# Altium PCB Moneybox.PcbDoc
Units mm, origin at the board's own origin, x right, y up, seen from the top; angles counter-clockwise.
Board outline 56.28 x 49.45 mm, 2 copper layers (Top Layer, Bottom Side), stack 1.536 mm thick; 40 components, 33 nets, 140 pads, 0 vias.
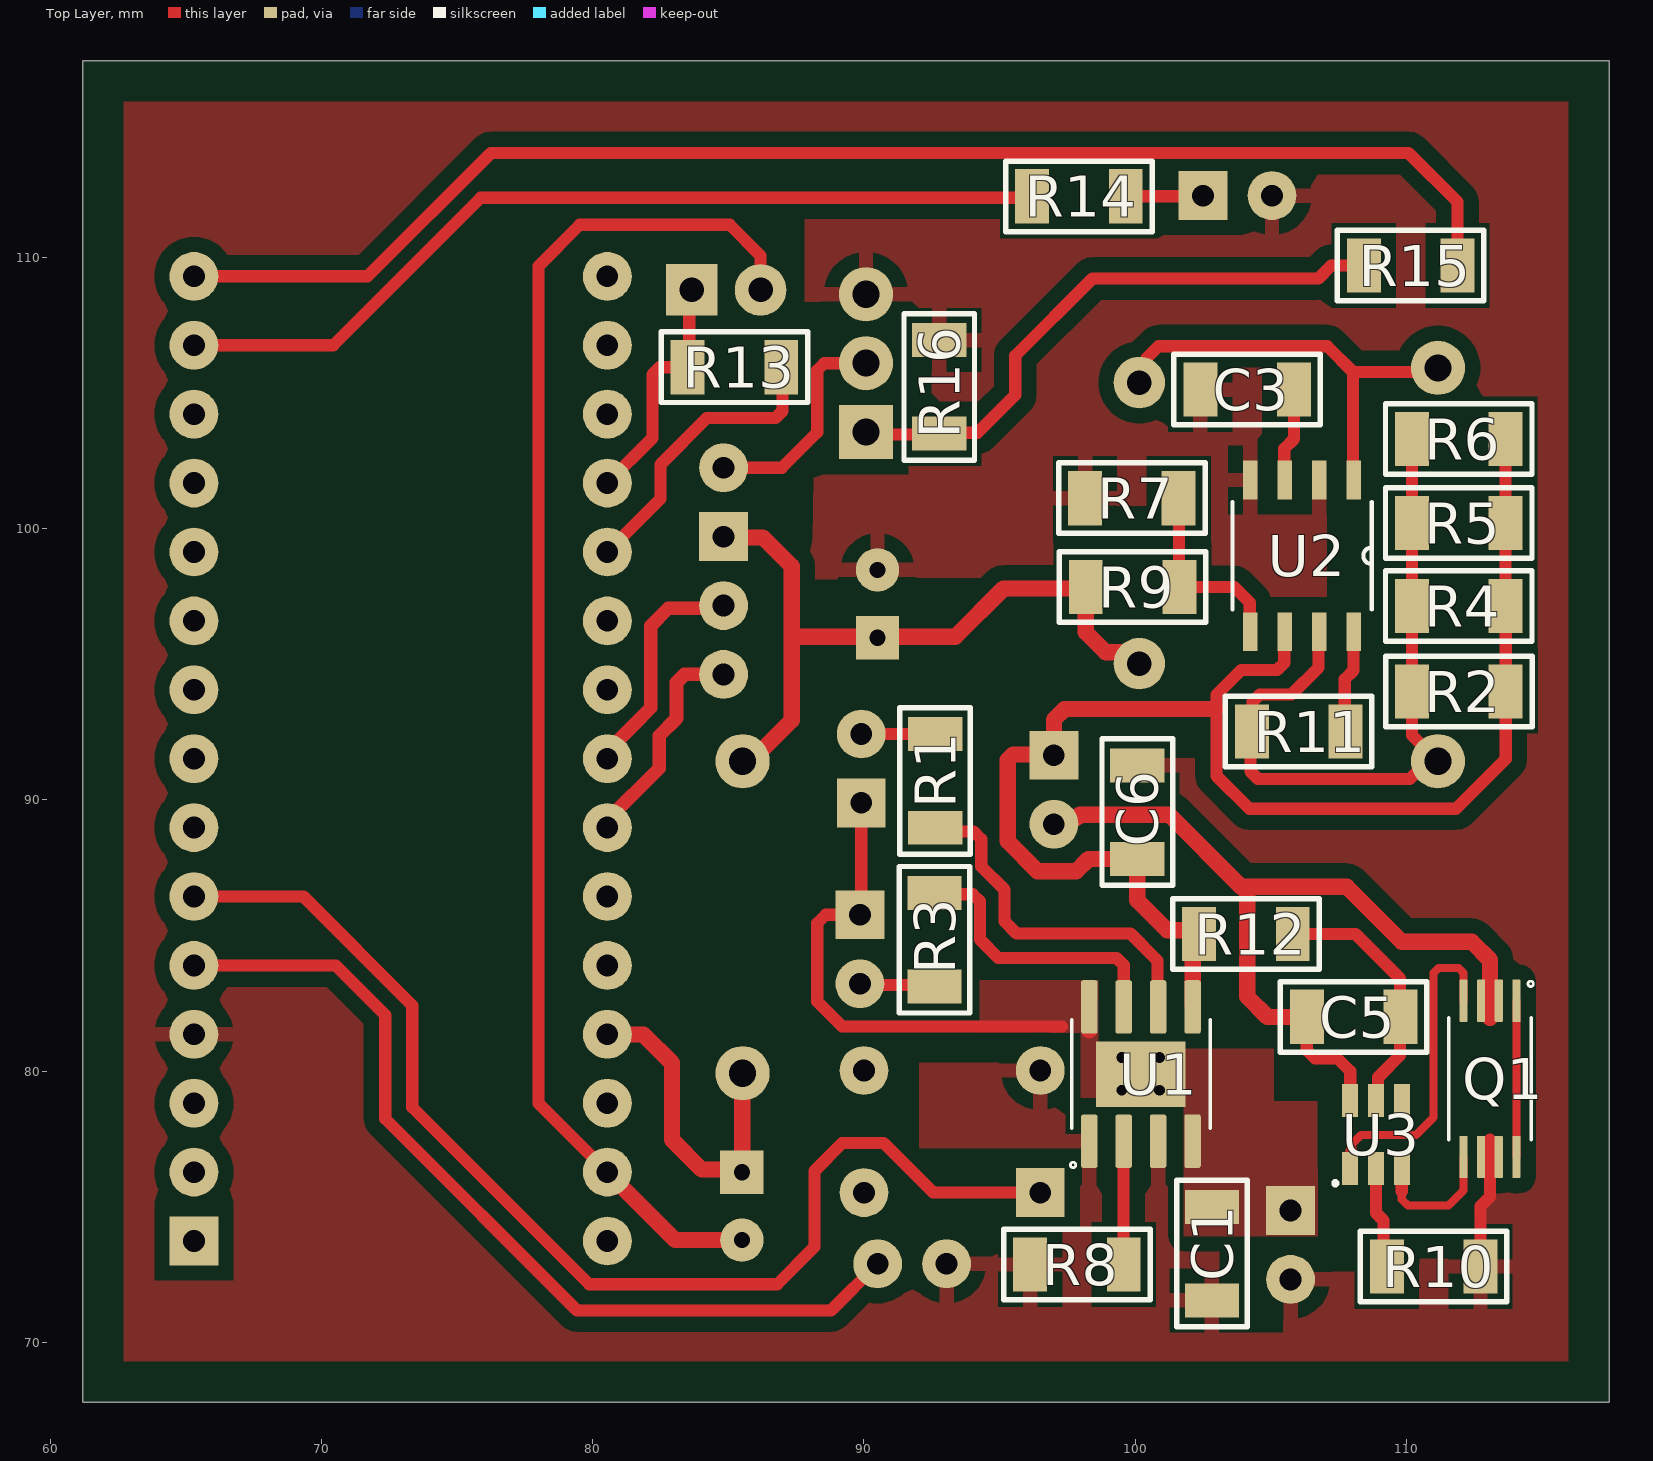
[diagram p0: Top Layer view]
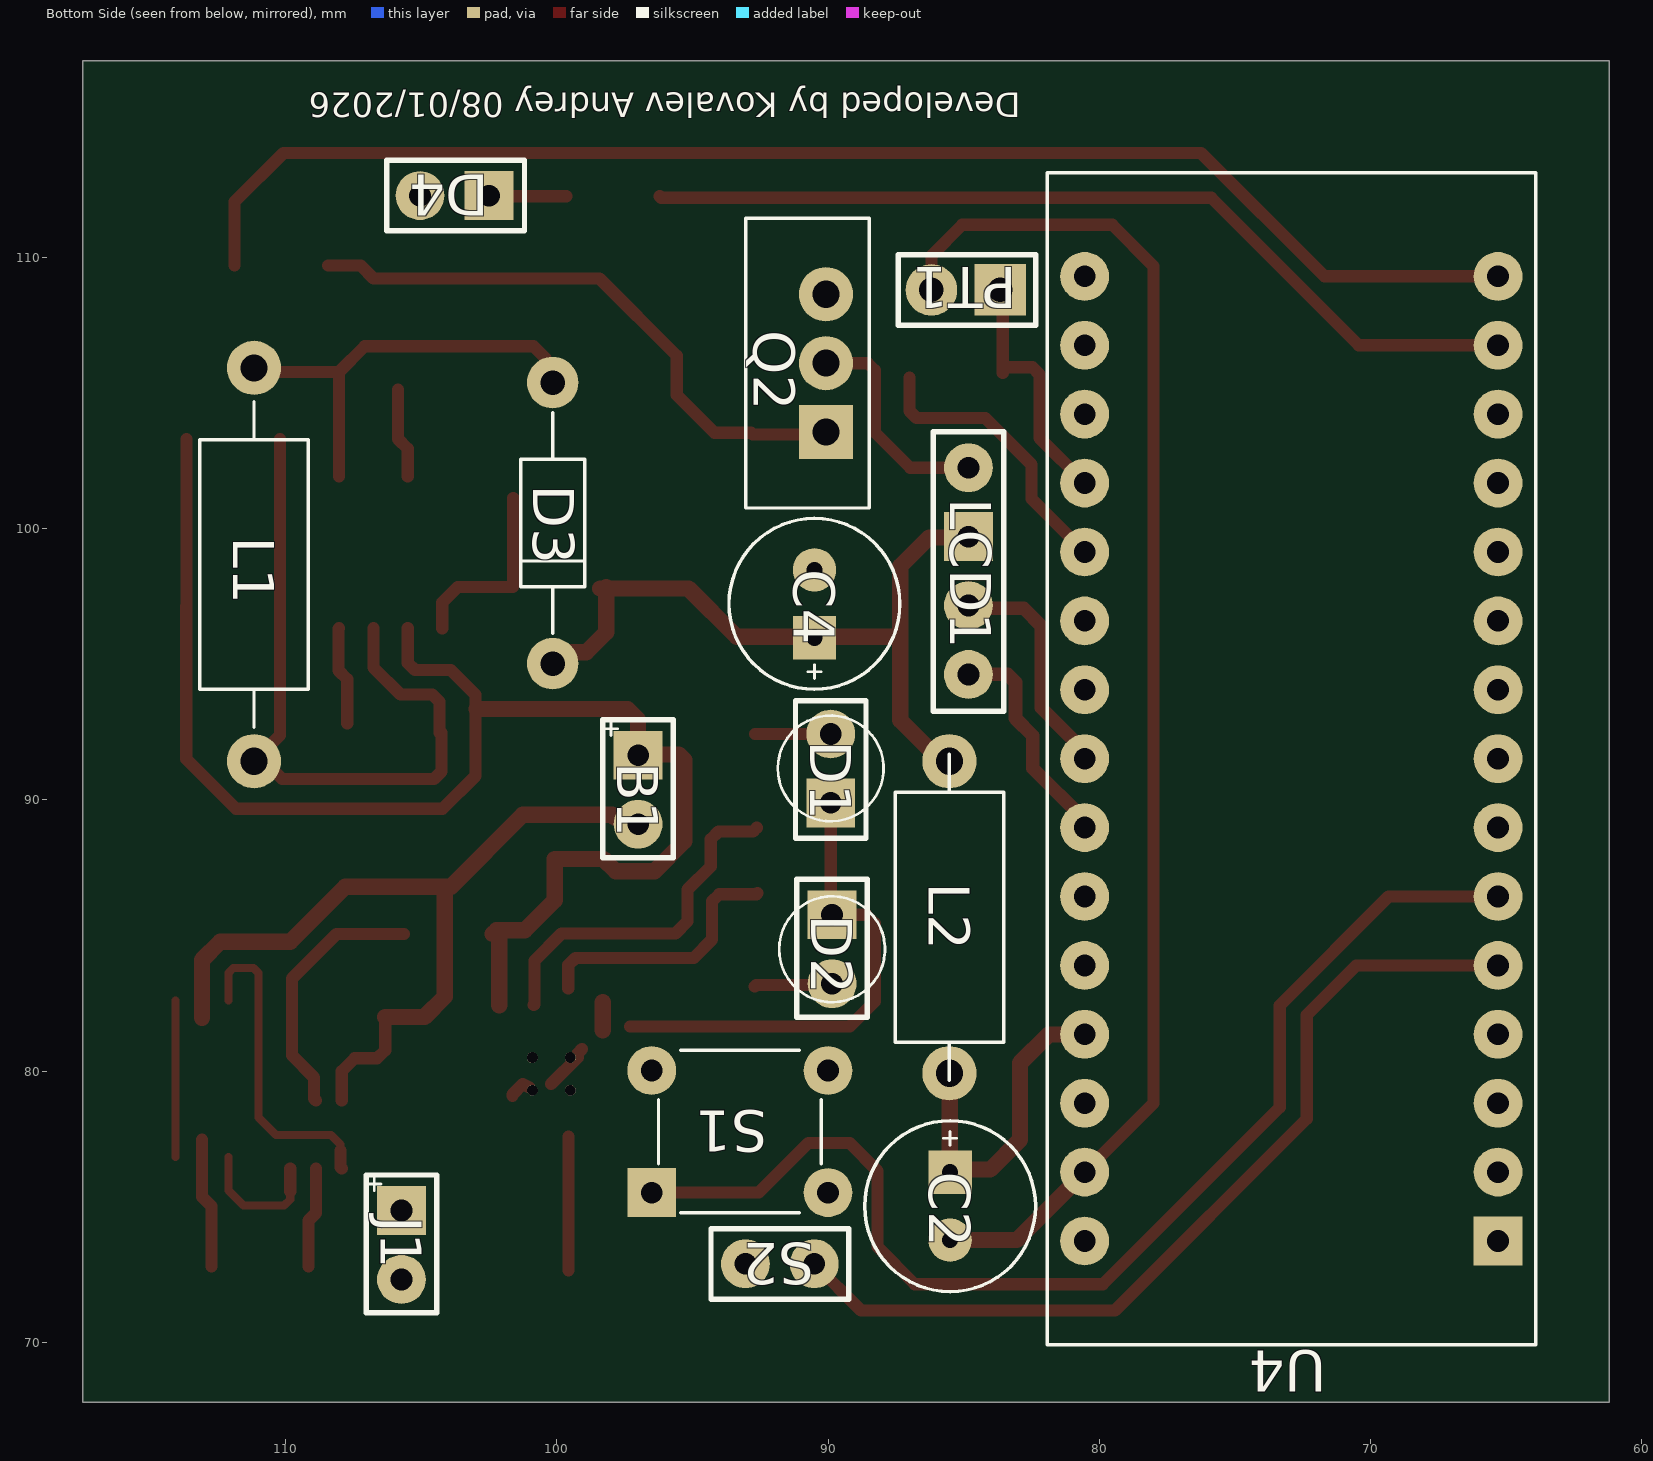
[diagram p1: Bottom Side view, seen from below]
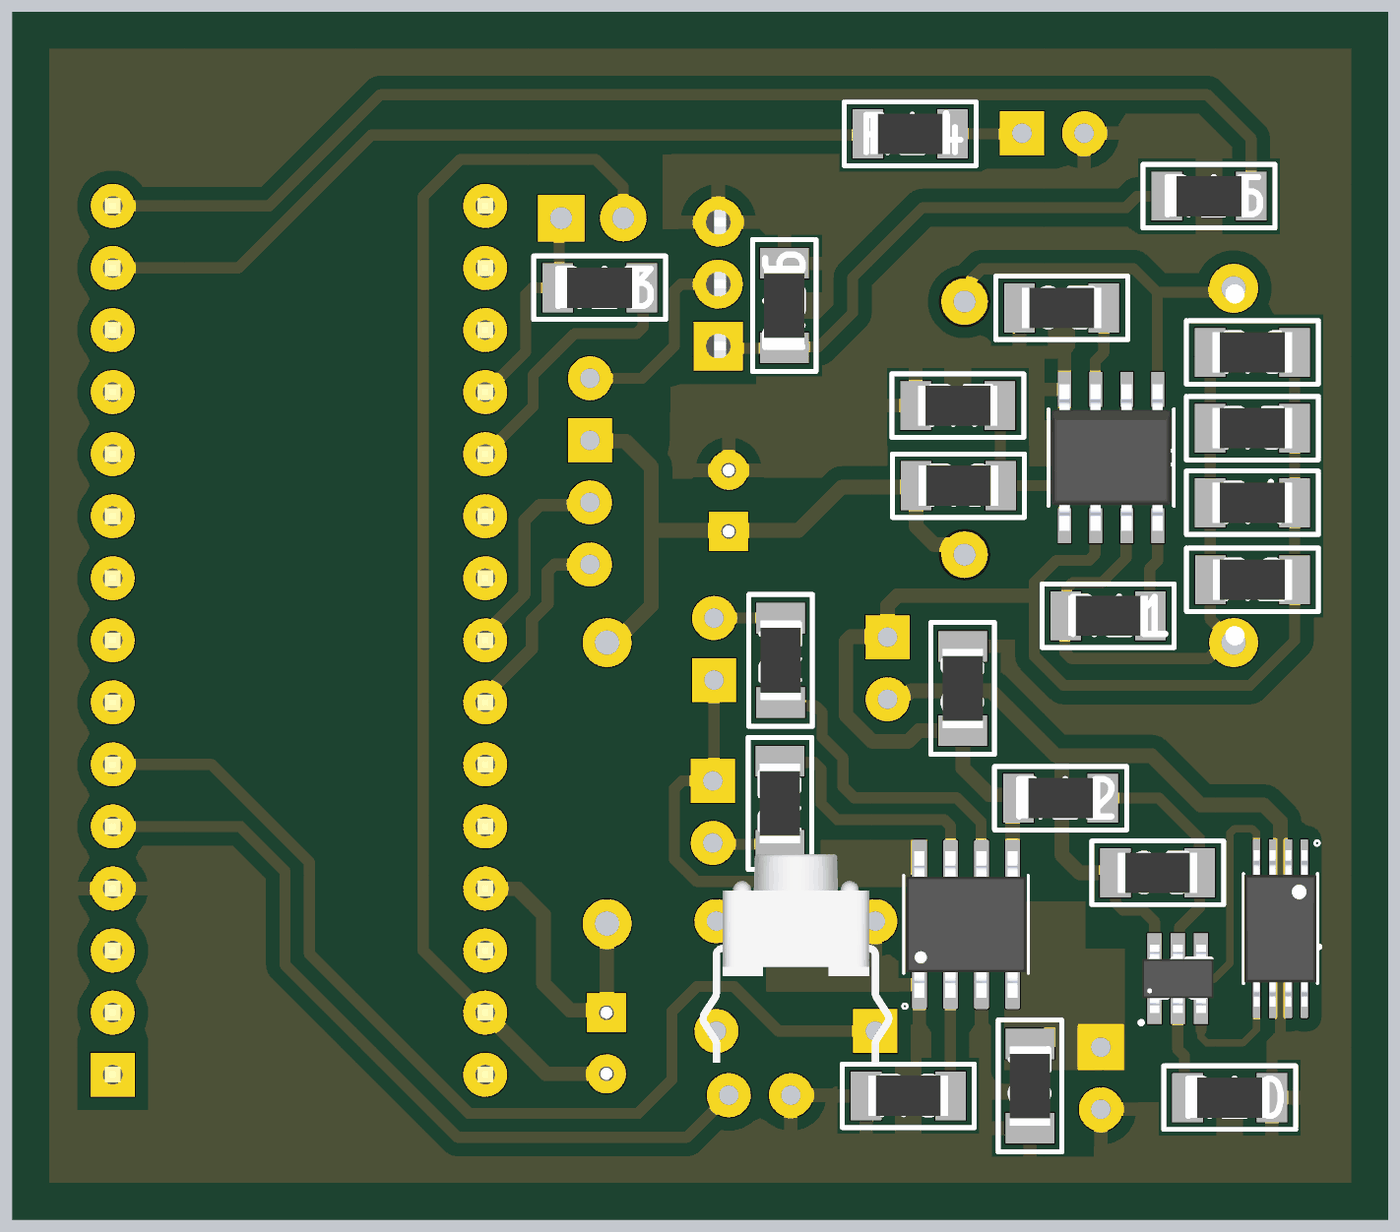
[diagram p2: 3D render of the assembled board from above, using the file's embedded part models]

## Layer stack, top to bottom
Top Solder: solder mask 0.0102, Solder Resist, Dk 3.5
Top Layer: signal copper 0.0356
Dielectric 1: dielectric 1.5, FR-4, Dk 4.8
Bottom Side: signal copper (thickness not stored)

## Board outline
61.2,117.25 117.475,117.25 117.475,67.8 61.2,67.8

## Design rules (kind name [scope] priority, off if disabled: settings)
BoardOutlineClearance [All] p1: gap=1.5 ignorepadtopadclearanceinfootprint=FALSE
Clearance [OnLayer('Top Layer')] p1: gap=0.45 ignorepadtopadclearanceinfootprint=FALSE except(0.2: SMDPad-SMDPad; 0.35: Arc-SMDPad Track-SMDPad; 0.55: Arc-Fill Arc-Poly Arc-Region Track-Fill Track-Poly Track-Region SMDPad-Fill SMDPad-Poly SMDPad-Region THPad-Fill THPad-Poly THPad-Region Via-Fill Via-Poly Via-Region Fill-Fill Fill-Poly Fill-Region Poly-Poly Poly-Region Region-Region)
Clearance Unplated_Pads_Clearance [IsPad and OnLayer ('Multi-layer') and not PadIsPlated] p2: gap=0.3 ignorepadtopadclearanceinfootprint=TRUE
DiffPairsRouting [All] p1: maxlimit=0.254 minlimit=0.254 mostfreqgap=0.254 toplayer_minwidth=0.381 toplayer_maxwidth=0.381 toplayer_prefwidth=0.381 bottomlayer_minwidth=0.381 bottomlayer_maxwidth=0.381 bottomlayer_prefwidth=0.381 substack1={2774025B-2029-49B0-88C8-9F4E20DB7E90} toplayer_{2774025b-2029-49b0-88c8-9f4e20db7e90}_mingap=0.3 toplayer_{2774025b-2029-49b0-88c8-9f4e20db7e90}_maxgap=1 toplayer_{2774025b-2029-49b0-88c8-9f4e20db7e90}_prefgap=0.45 toplayer_{2774025b-2029-49b0-88c8-9f4e20db7e90}_minwidth=0.3 toplayer_{2774025b-2029-49b0-88c8-9f4e20db7e90}_maxwidth=1 toplayer_{2774025b-2029-49b0-88c8-9f4e20db7e90}_prefwidth=0.45 bottomlayer_{2774025b-2029-49b0-88c8-9f4e20db7e90}_mingap=0.3 bottomlayer_{2774025b-2029-49b0-88c8-9f4e20db7e90}_prefgap=0.45 bottomlayer_{2774025b-2029-49b0-88c8-9f4e20db7e90}_minwidth=0.3 bottomlayer_{2774025b-2029-49b0-88c8-9f4e20db7e90}_maxwidth=1 bottomlayer_{2774025b-2029-49b0-88c8-9f4e20db7e90}_prefwidth=0.45 maxuncoupledlength=12.7
HoleToHoleClearance [All] p1: gap=0.2 allowstackedmicrovias=TRUE
MinimumSolderMaskSliver [All] p1: minsoldermaskwidth=0.15
PlaneClearance [All] p1: clearance=0.55
PlaneConnect PlaneConnect_1 [All] p1: planeconnectstyle=Relief reliefexpansion=0.508 reliefentries=4 reliefconductorwidth=0.55 reliefairgap=0.55
PlaneConnect "PlaneConnect_No termo" [InNet('NetC1_2')] p2: planeconnectstyle=Direct reliefexpansion=0.4 reliefentries=4 reliefconductorwidth=0.45 reliefairgap=0
PolygonConnect PolygonConnect_1 [InNet('NetC1_2')] p1: thpad.connectstyle=Direct thpad.reliefconductorwidth=0.254 thpad.reliefentries=4 thpad.polygonreliefangle="90 Angle" thpad.airgapwidth=0 smdpad.connectstyle=Direct smdpad.reliefconductorwidth=0.254 smdpad.reliefentries=4 smdpad.polygonreliefangle="90 Angle" smdpad.airgapwidth=0 via.connectstyle=Relief via.reliefconductorwidth=0.254 via.reliefentries=4 via.polygonreliefangle="90 Angle" via.airgapwidth=0.254
PolygonConnect [All] p2: connectstyle=Relief reliefconductorwidth=0.55 reliefentries=4 polygonreliefangle="90 Angle" airgapwidth=0.55
RoutingVias [All] p1: holewidth=0.6 width=0.6 viastyle="Through Hole" minholewidth=0.6 minwidth=0.6 maxholewidth=0.6 maxwidth=0.6
SilkToSilkClearance [All] p1: silktosilkclearance=0.1
SilkToSolderMaskClearance [IsPad vs IsText] p1: minsilkscreentomaskgap=0.1 clearancetoexposedcopper=TRUE
SolderMaskExpansion SolderMaskExpansion_Vias [IsVia and not InAnyComponent] p1: expansion=-3 istentingtop=FALSE
SolderMaskExpansion [All] p2: expansion=0.05 istentingtop=FALSE
SupplyNets "Schematic Supply Nets_6" [InNet('GND_IN')] p1: voltage=0.000
SupplyNets "Schematic Supply Nets_3" [InNet('GND_PWR')] p2: voltage=0.000
SupplyNets "Schematic Supply Nets_2" [InNet('GND_SIG')] p3: voltage=0.000
SupplyNets "Schematic Supply Nets_5" [InNet('+3V')] p4: voltage=0.000
SupplyNets "Schematic Supply Nets_1" [InNet('+5V')] p5: voltage=0.000
Width [All] p1: maxlimit=0.7 minlimit=0.254 preferedwidth=0.35 substack1={2774025B-2029-49B0-88C8-9F4E20DB7E90} toplayer_{2774025b-2029-49b0-88c8-9f4e20db7e90}_minwidth=0.3 toplayer_{2774025b-2029-49b0-88c8-9f4e20db7e90}_maxwidth=10 toplayer_{2774025b-2029-49b0-88c8-9f4e20db7e90}_prefwidth=0.45 bottomlayer_{2774025b-2029-49b0-88c8-9f4e20db7e90}_minwidth=0.3 bottomlayer_{2774025b-2029-49b0-88c8-9f4e20db7e90}_maxwidth=10 bottomlayer_{2774025b-2029-49b0-88c8-9f4e20db7e90}_prefwidth=0.4 minimp=50.000000 maximp=50.000000 favimp=50.000000
23 further rules are at their usual default settings.

## Components (designator, comment, footprint, x,y, rotation, side; value= is the part's Value field where it differs from the comment)
B1 "18650" "18650 PLS 2" 97,90.375 r180 bottom
C1 "Capicator" R1206 102.825,73.275 r90 top value=0.1μF
C2 "Capicator" "CAPICATOR Radial 6.3mm" 85.5,75.025 r270 bottom value=220μF
C3 "Capicator" R1206 104.125,105.125 r0 top value=470pF
C4 "Capicator" "CAPICATOR RADIAL 6.3MM" 90.5,97.229 r90 bottom value=470μF
C5 "Capicator" R1206 108.05,82.003 r0 top value=0.1μF
C6 "Capicator" R1206 100.075,89.55 r270 top value=10μF
D1 "IRLED" LED_DIP 89.9,91.161 r0 bottom
D2 "IRLED" LED_DIP 89.85,84.495 r180 bottom
D3 "1N5819" "DIOD 1N5819" 100.15,100.205 r270 bottom
D4 "IRLED" IRLED_DIP 103.77,112.275 r270 bottom
J1 "USB Type C" "18650 PLS 2" 105.725,73.595 r180 bottom
L1 "Inductor THT" "INDUCTOR THT"#1 111.159,98.677 r90 bottom value=47μH
L2 "Inductor THT" "INDUCTOR THT"#2 85.525,85.675 r90 bottom value=22μH
LCD1 "LCD1602 I2C" PLS-4 84.825,100.975 r180 bottom
PT1 "Phototransistors" "PHOTOTRANSISTORS DIP" 84.918,108.8 r270 bottom
Q1 "FS8205A" FS8205A 113.075,79.72 r270 top
Q2 "IRF3205PBF" "MOSFET IRF3205PBF" 90.075,103.56 r90 bottom
R1 "Resistor 1206" R1206 92.625,90.7 r270 top value=1k
R2 "Resistor 1206" R1206 111.929,94 r180 top value=1R
R3 "Resistor 1206" R1206 92.596,84.846 r90 top value=1k
R4 "Resistor 1206" R1206 111.925,97.15 r180 top value=1R
R5 "Resistor 1206" R1206 111.925,100.204 r180 top value=1R
R6 "Resistor 1206" R1206 111.925,103.304 r180 top value=1R
R7 "Resistor 1206" R1206 99.875,101.125 r0 top value=1200R
R8 "Resistor 1206" R1206 97.85,72.875 r180 top value=1.2k
R9 "Resistor 1206" R1206 99.9,97.85 r0 top value=3600R
R10 "Resistor 1206" R1206 111,72.8 r0 top value=1k
R11 "Resistor 1206" R1206 106.025,92.525 r180 top value=180R
R12 "Resistor 1206" R1206 104.079,85.057 r180 top value=100R
R13 "Resistor 1206" R1206 85.225,105.95 r180 top value=10k
R14 "Resistor 1206" R1206 97.925,112.25 r0 top value=220R
R15 "Resistor 1206" R1206 110.15,109.7 r180 top value=100R
R16 "Resistor 1206" R1206 92.775,105.225 r90 top value=10k
S1 "Сalibration" "TACTILE SWITCH" 93.25,77.775 r180 bottom
S2 "PWR" PLS-2 91.775,72.9 r270 bottom
U1 "TP4056" TP4056 100.21,79.893 r90 top
U2 "MC34063ACD-TR" MC34063ACD-TR_SOIC8 106.15,99 r270 top
U3 "DW01A" DW01A 108.875,77.67 r90 top
U4 "ARDUINO_NANO" ARDUINO_NANO 72.92,91.52 r0 bottom locked

## Footprints (in the part's own frame and the unit in brackets; to place one, negate y for a bottom-side part, rotate by r counter-clockwise, add the part's x,y. Pads: shape width x height; smd on the part's side, far side on the other; paste and mask are expansions set on the pad)
"18650 PLS 2" [mm]
  rect 1.8x1.8 hole 0.8: 1(0,1.27)
  round 1.8 hole 0.8: 2(0,-1.27)
  silkscreen extent -1.3,-2.5 1.3,2.58
ARDUINO_NANO [mm]
  rect 1.8x1.8 hole 0.8: 1(-7.62,17.78)
  round 1.8 hole 0.8: 2(-7.62,15.24) 3(-7.62,12.7) 4(-7.62,10.16) 5(-7.62,7.62) 6(-7.62,5.08) 7(-7.62,2.54) 8(-7.62,0) 9(-7.62,-2.54) 10(-7.62,-5.08) 11(-7.62,-7.62) 12(-7.62,-10.16) 13(-7.62,-12.7) 14(-7.62,-15.24) 15(-7.62,-17.78) 16(7.62,-17.78) 17(7.62,-15.24) 18(7.62,-12.7) 19(7.62,-10.16) 20(7.62,-7.62) 21(7.62,-5.08) 22(7.62,-2.54) 23(7.62,0) 24(7.62,2.54) 25(7.62,5.08) 26(7.62,7.62) 27(7.62,10.16) 28(7.62,12.7) 29(7.62,15.24) 30(7.62,17.78)
  silkscreen extent -9,-21.6 9,21.6, body extent -9,-23.4 9,21.6, height 12.6
"CAPICATOR Radial 6.3mm" [mm]
  rect 1.6x1.6 hole 0.6: 1(-1.25,0)
  round 1.6 hole 0.6: 2(1.25,0)
  silkscreen extent -3.15,-3.15 3.15,3.15, body extent -3.15,-3.14 3.15,3.14, height 11.2
"CAPICATOR RADIAL 6.3MM" [mm]
  rect 1.6x1.6 hole 0.6: 1(-1.25,0)
  round 1.6 hole 0.6: 2(1.25,0)
  silkscreen extent -3.15,-3.15 3.15,3.15, body extent -3.15,-3.14 3.15,3.14, height 12.7
"DIOD 1N5819" [mm]
  round 1.9 hole 0.9 mask+0.102: 1(-5.18,0) 2(5.18,0)
  silkscreen extent -4.07,-1.17 4.07,1.17
DW01A [mm]
  rect 1.21x0.59 smd: 1(-1.255,0.95) 2(-1.255,0) 3(-1.255,-0.95) 4(1.255,-0.95) 5(1.255,0) 6(1.255,0.95)
  silkscreen extent -1.85,1.45 -1.75,1.55, body extent -1.4,-1.45 1.4,1.45, height 1.45
FS8205A [mm]
  rrect25% 1.56x0.3 smd: 1(-2.88,0.975) 2(-2.88,0.325) 3(-2.88,-0.325) 4(-2.88,-0.975) 5(2.88,-0.975) 6(2.88,-0.325) 7(2.88,0.325) 8(2.88,0.975)
  silkscreen extent -3.6,-1.52 2.25,1.6, body extent -3.2,-1.47 3.2,1.47, height 1.2
"INDUCTOR THT"#1 [mm]
  round 2 hole 1: 1(-7.25,0) 2(7.25,0)
  silkscreen extent -6,-2 6,2, body extent -7.37,-1.95 7.43,2.05, height 6
"INDUCTOR THT"#2 [mm]
  round 2 hole 1: 1(-5.75,0) 2(5.75,0)
  silkscreen extent -6,-2 6,2
IRLED_DIP [mm]
  rect 1.8x1.8 hole 0.8: 1(0,1.27)
  round 1.8 hole 0.8: 2(0,-1.27)
  silkscreen extent -1.3,-2.5 1.3,2.58
LED_DIP [mm]
  rect 1.8x1.8 hole 0.8: 1(0,1.27)
  round 1.8 hole 0.8: 2(0,-1.27)
  silkscreen extent -1.95,-2.5 1.95,2.58
MC34063ACD-TR_SOIC8 [mil]
  rect 56x21 smd: 1(-110,75) 2(-110,25) 3(-110,-25) 4(-110,-75) 5(110,-75) 6(110,-25) 7(110,25) 8(110,75)
  silkscreen extent -78,-101 78,101, body extent -118,-96 118,96, height 69
"MOSFET IRF3205PBF" [mm]
  rect 2x2 hole 1: 1(0,0)
  round 2 hole 1: 2(2.54,0) 3(5.08,0)
  silkscreen extent -2.8,-1.6 7.88,2.96, body extent -2.54,-1.4 7.62,2.79, height 20.57
"PHOTOTRANSISTORS DIP" [mm]
  rect 1.9x1.9 hole 0.9: 1(0,1.27)
  round 1.9 hole 0.9: 2(0,-1.27)
  silkscreen extent -1.3,-2.5 1.3,2.58
PLS-2 [mm] "Штыри однорядные 1x2 конт. шаг 2.54 мм, вертик. на плату"
  round 1.8 hole 0.8: 1(0,1.27) 2(0,-1.27)
  silkscreen extent -1.3,-2.54 1.3,2.54
PLS-4 [mm] "Штыри однорядные 1x4 конт. шаг 2.54 мм, вертик. на плату"
  round 1.8 hole 0.8: 1(0,1.27) 3(0,-3.81) 4(0,-6.35)
  rect 1.8x1.8 hole 0.8: 2(0,-1.27)
  silkscreen extent -1.3,-7.7 1.3,2.6
R1206 [mm]
  rect 1.25x2 smd: 1(-1.725,0) 2(1.725,0)
  silkscreen extent -2.7,-1.3 2.7,1.3, body extent -1.63,-0.82 1.63,0.82, height 0.7
"TACTILE SWITCH" [mm]
  rect 1.8x1.8 hole 0.8: 1(-3.25,-2.25)
  round 1.8 hole 0.8: 2(3.25,-2.25) 3(-3.25,2.25) 4(3.25,2.25)
  silkscreen extent -3,-3 3,3, body extent -3.94,-3 3.94,3, height 5
TP4056 [mm]
  rrect25% 1.97x0.6 smd: 1(-2.475,1.905) 2(-2.475,0.635) 3(-2.475,-0.635) 4(-2.475,-1.905) 5(2.475,-1.905) 6(2.475,-0.635) 7(2.475,0.635) 8(2.475,1.905)
  rect 2.413x3.302 smd paste-3: 9(0,0)
  silkscreen extent -3.45,-2.55 2,2.6, body extent -3,-2.45 3,2.45, height 1.75

## Part data
B1: library part "Baterry 18650"
D1 D2 D4: "infrared LED 850nm", Package="Radial Kingbright", Availability="In Stock", Check_prices=https://www.snapeda.com/parts/WP7113ID/Kingbright/view-part/?ref=eda, MF=Kingbright, MP=WP7113ID, Price=None, Purchase-URL=https://pricing.snapeda.com/search/part/WP7113ID/?ref=eda, SnapEDA_Link=https://www.snapeda.com/parts/WP7113ID/Kingbright/view-part/?ref=snap
D3: "1A, 40V, Planar Schottky", Package="DO-41-2 Taiwan Semiconductor", Check_prices=https://www.snapeda.com/parts/1N5819/taiwan/view-part/?ref=eda, MF="Taiwan Semiconductor", MP=1N5819, SnapEDA_Link=https://www.snapeda.com/parts/1N5819/taiwan/view-part/?ref=snap
J1: "USB Type C, Power Only, Top mount, Center Height 1.68mm, Single Row, Surface Mount", Package=None, Check_prices=https://www.snapeda.com/parts/GSB1C411101DSHR/Amphenol/view-part/?ref=eda, MF=Amphenol, MP=GSB1C411101DSHR, SnapEDA_Link=https://www.snapeda.com/parts/GSB1C411101DSHR/Amphenol/view-part/?ref=snap
L1 L2: "Inductor THT axial", Package=None, Check_prices=https://www.snapeda.com/parts/B78108S1102K000/TDK/view-part/?ref=eda, MF="TDK Electronics", MP=B78108S1102K000, SnapEDA_Link=https://www.snapeda.com/parts/B78108S1102K000/TDK/view-part/?ref=snap
PT1: "Phototransistors 850nm Top View Radial", Package="Radial Vishay", Check_prices=https://www.snapeda.com/parts/BPW85A/Vishay+Semiconductor+Opto+Division/view-part/?ref=eda, MF=Vishay, MP=BPW85A, SnapEDA_Link=https://www.snapeda.com/parts/BPW85A/Vishay+Semiconductor+Opto+Division/view-part/?ref=snap
Q1: Package=Package, Check_prices=https://www.snapeda.com/parts/FS8205A/Fortune+Semiconductor/view-part/?ref=eda, MF="Fortune Semiconductor", MP=FS8205A, SnapEDA_Link=https://www.snapeda.com/parts/FS8205A/Fortune+Semiconductor/view-part/?ref=snap
Q2: "MOSFET, Power,N-Ch,VDSS 55V,RDS(ON) 8 Milliohms,ID 110A,TO-220AB,PD 200W,gFS 44S", Package="TO-220-3 Infineon", Check_prices=https://www.snapeda.com/parts/IRF3205PBF/Infineon/view-part/?ref=eda, MF="Infineon Technologies", MP=IRF3205PBF, SnapEDA_Link=https://www.snapeda.com/parts/IRF3205PBF/Infineon/view-part/?ref=snap
R1 R2 R3 R4 R5 R6 R7 R8 R9 R10 R11 R12 R13 R14 R15 R16: library part R1206
S1: library part "Tactile Switch", Package=None, Availability=Unavailable, MP=TL1105AF160Q, Price=None
S2: library part "Switch PLS-2", Package=None, Availability=Unavailable, MP=TL1105AF160Q, Price=None
U1: "Complete single cell Li-Ion battery with a constant current / constant voltage linear charger", Package=Package, Availability="Not in stock", Check_prices=https://www.snapeda.com/parts/TP4056/NanJing+Top+Power+ASIC+Corp./view-part/?ref=eda, MF="NanJing Top Power ASIC Corp.", MP=TP4056, Price=None, SnapEDA_Link=https://www.snapeda.com/parts/TP4056/NanJing+Top+Power+ASIC+Corp./view-part/?ref=snap
U2: "Buck, Boost Switching Regulator IC Positive or Negative Adjustable 1.25V 1 Output 1.5A (Switch) 8-SOIC (0.154, 3.90mm Width)", Package=None, Check_prices=https://www.snapeda.com/parts/MC34063ACD-TR/STMicroelectronics/view-part/?ref=eda, MF=STMicroelectronics, MP=MC34063ACD-TR, SnapEDA_Link=https://www.snapeda.com/parts/MC34063ACD-TR/STMicroelectronics/view-part/?ref=snap
U3: "One Cell Lithium-ion/Polymer Battery Protection IC", Package="SOT-23-6 Fortune Semiconductor", Check_prices=https://www.snapeda.com/parts/DW01A/Fortune+Semiconductor/view-part/?ref=eda, MF="Fortune Semiconductor", MP=DW01A, SnapEDA_Link=https://www.snapeda.com/parts/DW01A/Fortune+Semiconductor/view-part/?ref=snap
U4: "ATmega328 Arduino Nano", Package="Non-Standard Arduino", Check_prices=https://www.snapeda.com/parts/Arduino%20Nano/Arduino/view-part/?ref=eda, MF=Arduino, MP="Arduino Nano", SnapEDA_Link=https://www.snapeda.com/parts/Arduino%20Nano/Arduino/view-part/?ref=snap
C1 C3 C5 C6: Polarity=+, Types=Ceramic
C2 C4: Polarity=+, Types=Electrolytic

## Free pads (board coordinates)
  round 0.4 hole 0.4: 2(99.5,79.3) 2(99.5,80.5) 2(100.9,79.3) 2(100.9,80.5)

## Nets (pads, with @x,y where several pads share a name; then routed paths per layer and width w, separated by ;. In a path a pad name is that pad's centre, name@x,y a point inside that pad or via, vN(x,y) a via of type N, cw(c..) or ccw(c..) an arc to the next point about the centre after c; other vN are vias at no path point)
+3V: B1.1 C6.2 R2.1 R4.1 R5.1 R6.1 R12.2 U1.5 U2.6 | length 55.5
  Top Layer w0.45: B1.1@96.97,91.675 B1.1 B1.1@97.001,91.646 ; 102.95,93.35 103,93.3 ; U2.6@105.49,96.331 105.49,95.049 105.227,94.785 103.91,94.785 103,93.875 103,93.3 ; R4.1 R5.1 R6.1 ; R4.1@113.654,97.146 R2.1 113.654,91.504 111.825,89.675 104.208,89.675 103,90.883 103,93.3
  Top Layer w0.6: B1.1@96.97,91.675 95.501,91.675 95.3,91.474 95.3,88.472 96.397,87.375 97.825,87.375 98.275,87.825 C6.2 100.075,86.3 101.181,85.194 102.217,85.194 R12.2 ; B1.1@97.001,91.646 97.001,92.956 97.395,93.35 102.95,93.35 ; U1.5@102.115,82.436 R12.2@102.115,84.99
+5V: C4.1 D3.2 L2.2 LCD1.2 R9.1 | length 26.8
  Top Layer w0.6: LCD1.2 84.854,99.676 86.274,99.676 87.337,98.613 87.337,96.012 87.337,92.937 85.825,91.425 L2.2 ; 87.397,96.012 90.5,96.012 93.362,96.012 95.146,97.796 R9.1@98.175,97.796 ; R9.1 R9.1@98.175,97.796 ; R9.1@98.4,97.796 R9.1@98.175,97.796 ; D3.2@100.15,95.265 99.974,95.441 98.91,95.441 98.175,96.176 R9.1@98.175,97.796
GND_IN: C1.1 C3.1 C4.2 C6.1 D4.2 J1.2 Q1.6 Q1.7 Q2.3 R7.1 R8.2 R10.2 R16.2 S1.3 S2.2 U1.1 U1.3 U2.2 U2.4 U4.4 | length 4.8
  Top Layer w0.45: R10.2 112.725,75.025 113.075,75.375 113.075,77.47
GND_PWR: LCD1.1 Q2.2 | length 8.2
  Top Layer w0.45: LCD1.1 86.97,102.245 88.275,103.55 88.275,105.836 88.539,106.1 Q2.2
GND_SIG: C2.2 PT1.2 U4.29 | length 51
  Top Layer w0.45: U4.29 78,78.82 78,109.675 79.525,111.2 85.049,111.2 86.188,110.061 PT1.2
  Top Layer w0.6: U4.29 83.045,73.775 C2.2
NetB1_2: B1.2 C5.1 Q1.2 Q1.3 U3.6 | length 31.3
  Top Layer w0.45: C5.1 106.325,82 106.325,80.775 106.625,80.475 107.45,80.475 107.925,80 U3.6
  Top Layer w0.6: B1.2 97.23,89.335 97.836,89.335 97.951,89.45 101.25,89.45 103.9,86.8 104.125,86.8 ; C5.1@106.325,82 104.875,82 104.125,82.75 104.125,86.8 ; 113.075,81.97 113.075,84.1 112.4,84.775 109.825,84.775 107.8,86.8 104.125,86.8
NetC1_2: C1.2 D1.1 D2.1 J1.1 pad.2 U1.4 U1.8 U1.9 | length 21.8
  Top Layer w0.45: D1.1@89.9,89.9 D1.1 89.9,85.815 D2.1 88.589,85.765 88.275,85.451 88.275,82.573 89.198,81.65 97.3,81.65 ; U1.9@99.072,80.814 99.228,80.658 99.228,80.506 U1.9@100.21,79.525 ; pad.2@101,79.4 101.25,79.525 101.631,79.144 U1.9@101.631,79.099
  Top Layer w0.6: U1.8@98.3,81.513 U1.8@98.3,82.542
NetC2_1: C2.1 L2.1 U4.27 | length 12.4
  Top Layer w0.6: U4.27 80.55,81.35 81.875,81.35 82.925,80.3 82.925,77.475 84.026,76.374 85.302,76.374 85.352,76.423 C2.1 85.513,76.288 85.513,79.913 L2.1
NetC3_2: C3.2 U2.3 | length 3.4
  Top Layer w0.45: U2.3@105.49,101.919 105.496,101.925 105.496,102.946 105.85,103.3 C3.2
NetC5_2: C5.2 R12.1 U3.5 | length 9.7
  Top Layer w0.45: R12.1@105.632,85.057 108.118,85.057 109.76,83.415 109.76,82.267 109.764,82.264 109.764,80.589 108.945,79.77 108.945,78.995 U3.5
NetD1_2: D1.2 R1.1 | length 2.8
  Top Layer w0.45: D1.2@89.9,92.44 89.908,92.432 R1.1@92.692,92.432
NetD2_2: D2.2 R3.1 | length 2.9
  Top Layer w0.45: D2.2 89.902,83.173 92.648,83.173 R3.1@92.7,83.121
NetD3_1: D3.1 L1.2 U2.1 | length 16.3
  Top Layer w0.45: D3.1@99.733,105.6 99.973,105.6 100.427,106.055 100.427,106.295 100.858,106.725 107.075,106.725 108.03,105.77 ; U2.1@108.03,101.919 108.03,105.77 ; L1.2 111.002,105.77 108.03,105.77
NetD4_1: D4.1 R14.2 | length 2.8
  Top Layer w0.45: R14.2 D4.1@102.475,112.25
NetL1_1: L1.1 R2.2 R4.2 R5.2 R6.2 R11.2 U2.7 | length 26.1
  Top Layer w0.45: R11.2@104.25,92.475 104.25,91.05 104.525,90.775 110.12,90.775 110.773,91.427 L1.1 ; R11.2@104.325,92.475 104.325,93.622 104.589,93.885 105.76,93.885 106.76,94.885 U2.7@106.76,96.331 ; R2.2@110.2,94.004 R4.2 R5.2 R6.2 ; R2.2 110.204,92.385 110.657,91.933 L1.1@110.657,91.608
NetLCD1_3: LCD1.3 U4.23 | length 8.3
  Top Layer w0.5: U4.23 80.54,91.797 81.5,92.757 82.14,93.397 82.14,96.415 82.789,97.064 LCD1.3@84.656,97.064
NetLCD1_4: LCD1.4 U4.24 | length 8.3
  Top Layer w0.5: U4.24 80.54,89.257 82.45,91.167 82.45,92.364 83.09,93.004 83.09,94.332 83.383,94.625 LCD1.4
NetPT1_1: PT1.1 R13.2 U4.19 | length 9.2
  Top Layer w0.45: U4.19 82.2,103.34 82.2,105.686 82.464,105.95 R13.2 ; R13.2@83.561,105.739 83.561,108.714 PT1.1
NetQ1_1: Q1.1 Q1.8 | length 5.8
  Top Layer w0.3: Q1.8 Q1.1
NetQ1_4: Q1.4 U3.1 | length 11.9
  Top Layer w0.3: 107.975,77.075 107.969,77.081 107.969,77.294 108.325,77.65 110.35,77.65 111,78.3 111,83.624 111.176,83.8 111.924,83.8 112.1,83.624 Q1.4
  Top Layer w0.45: U3.1 107.969,76.459 107.969,77.081
NetQ1_5: Q1.5 U3.3 | length 5
  Top Layer w0.3: 109.825,75.575 109.825,75.275 110.05,75.05 111.55,75.05 112.1,75.6 112.1,76.825 Q1.5
  Top Layer w0.45: 109.825,75.575 U3.3
NetQ2_1: Q2.1 R15.2 R16.1 | length 22
  Top Layer w0.45: Q2.1@89.866,103.475 91.85,103.475 92.775,103.475 92.836,103.536 94.186,103.536 95.575,104.925 95.575,106.375 98.425,109.225 106.75,109.225 107.225,109.7 R15.2
NetR1_2: R1.2 U1.6 | length 13.2
  Top Layer w0.45: R1.2 92.761,88.839 94.036,88.839 94.325,88.55 94.325,87.55 95.175,86.7 95.175,85.525 95.625,85.075 99.825,85.075 100.825,84.075 100.825,82.455 U1.6@100.845,82.436
NetR3_2: R3.2 U1.7 | length 9.8
  Top Layer w0.45: R3.2 92.641,86.525 94.011,86.525 94.275,86.261 94.275,84.85 94.95,84.175 99.311,84.175 99.575,83.911 U1.7@99.575,83.05
NetR7_2: R7.2 R9.2 U2.5 | length 7.1
  Top Layer w0.45: R7.2 101.612,101.113 101.612,97.863 R9.2 103.65,97.85 104.22,97.28 U2.5@104.22,96.331
NetR8_1: R8.1 U1.2 | length 4.9
  Top Layer w0.45: R8.1@99.57,72.662 U1.2@99.57,77.592
NetR10_1: R10.1 U3.2 | length 3.7
  Top Layer w0.45: U3.2 108.875,74.775 109.15,74.5 R10.1@109.15,72.8
NetR11_1: R11.1 U2.8 | length 3.6
  Top Layer w0.45: R11.1@107.725,92.825 107.725,94.45 108.05,94.775 108.05,96.311 U2.8@108.03,96.331
NetR13_1: R13.1 U4.20 | length 10.6
  Top Layer w0.45: U4.20 82.5,101.1 82.5,102.367 84.208,104.075 86.736,104.075 87,104.339 R13.1@87,105.575
NetR14_1: R14.1 U4.14 | length 33.2
  Top Layer w0.45: U4.14 70.435,106.76 75.875,112.2 96.15,112.2 R14.1
NetR15_1: R15.1 U4.15 | length 51.6
  Top Layer w0.45: U4.15 71.7,109.3 76.25,113.85 110.075,113.85 111.875,112.05 R15.1
NetS1_1: S1.1 U4.6 | length 43.9
  Top Layer w0.45: U4.6 69.335,86.44 73.35,82.425 73.35,78.675 79.875,72.15 86.8,72.15 88.175,73.525 88.175,76.325 89.2,77.35 90.725,77.35 92.55,75.525 S1.1
NetS2_1: S2.1 U4.5 | length 33.4
  Top Layer w0.45: U4.5 70.525,83.9 72.35,82.075 72.35,78.25 79.425,71.175 88.78,71.175 S2.1
pads on no net: S1.2 S1.4 U3.4 U4.1 U4.2 U4.3 U4.7 U4.8 U4.9 U4.10 U4.11 U4.12 U4.13 U4.16 U4.17 U4.18 U4.21 U4.22 U4.25 U4.26 U4.28 U4.30

## Polygon pours and split planes (outlines as drawn)
GND_IN on Top Layer "GND_IN_L01_P004" (solid, remove dead copper, pour order 4): 61.082,117.51 119.082,117.51 119.082,68.169 61.082,68.169
NetC1_2 on Top Layer "NETC1_2_L01_P000" (solid, pour order 0): 101.78,80.825 105.1,80.825 105.1,78.9 106.7,78.9 106.725,73.925 101.78,73.925
NetC1_2 on Top Layer "NETC1_2_L01_P003" (solid, pour order 3): 94.263,83.35 98.638,83.35 98.638,79.025 98,79.025 98,81.42 94.263,81.43

## Other copper
Top Layer:
  pour cut-out: 95.787,73.7 94.663,73.7 94.663,75.15 95.813,75.15
  pour cut-out: 112.375,74.6 112.375,74.975 112.25,74.85 112.25,74.825
  pour cut-out: 91.55,80.325 91.45,81.337 95.425,81.337 95.3,80.325
  pour cut-out: 91.336,77.137 97.5,77.137 97.5,76.362 91.322,76.362
  pour cut-out: 103.531,71.825 105.444,71.825 105.444,70.375 103.506,70.375
  pour cut-out: 89.194,106.9 87.281,106.9 87.281,108.35 89.219,108.35
  pour cut-out: 87.8,111.407 87.8,107.375 86.35,107.375 86.35,111.432
  pour cut-out: 103.238,91.55 101.325,91.55 101.325,93 103.263,93
  pour cut-out: 108.954,97.2 107.075,97.2 107.075,100.65 109.013,100.65
  pour cut-out: 101.188,99.375 99.275,99.375 99.275,100.825 101.213,100.825
  pour cut-out: 99.038,110.7 97.125,110.7 97.125,112.15 99.063,112.15
  pour cut-out: 92.463,104.5 90.55,104.5 90.55,105.95 92.488,105.95
  pour cut-out: 94.711,96.725 91.475,96.725 91.475,98.175 94.736,98.175
  pour cut-out: 89.538,96.675 87.625,96.675 87.625,98.125 89.563,98.125
  pour cut-out: 88.087,99.6 86.963,99.6 86.963,102.625 88.14,102.625
  pour cut-out: 92.025,76.875 91.013,76.775 91.013,80.75 92.025,80.625
  pour cut-out: 104.238,72.25 103.113,72.25 103.113,73.7 104.263,73.7
  pour cut-out: 108.212,72.625 107.087,72.625 107.087,74.075 108.238,74.075
  pour cut-out: 85.95,109.85 85.95,110.775 82,110.775 82,109.875
  pour cut-out: 111.587,73.1 110.462,73.1 110.462,74.55 111.612,74.55

## Silkscreen, mask and mechanical layers (free items; w line width, h text height)
Bottom Overlay:
  text "Developed by Kovalev Andrey 08/01/2026" at 82.904,116.071 h0.9 r180